# Altium PCB PCB.PcbDoc
Units mm, origin at the board's own origin, x right, y up, seen from the top; angles counter-clockwise.
Board outline 44.96 x 25.27 mm, 4 copper layers (Top Layer, GND Plane, Power Plane, Bottom Layer), stack 1.508 mm thick; 42 components, 39 nets, 209 pads, 132 vias.
Unrouted connection lines stored in the file: 6.
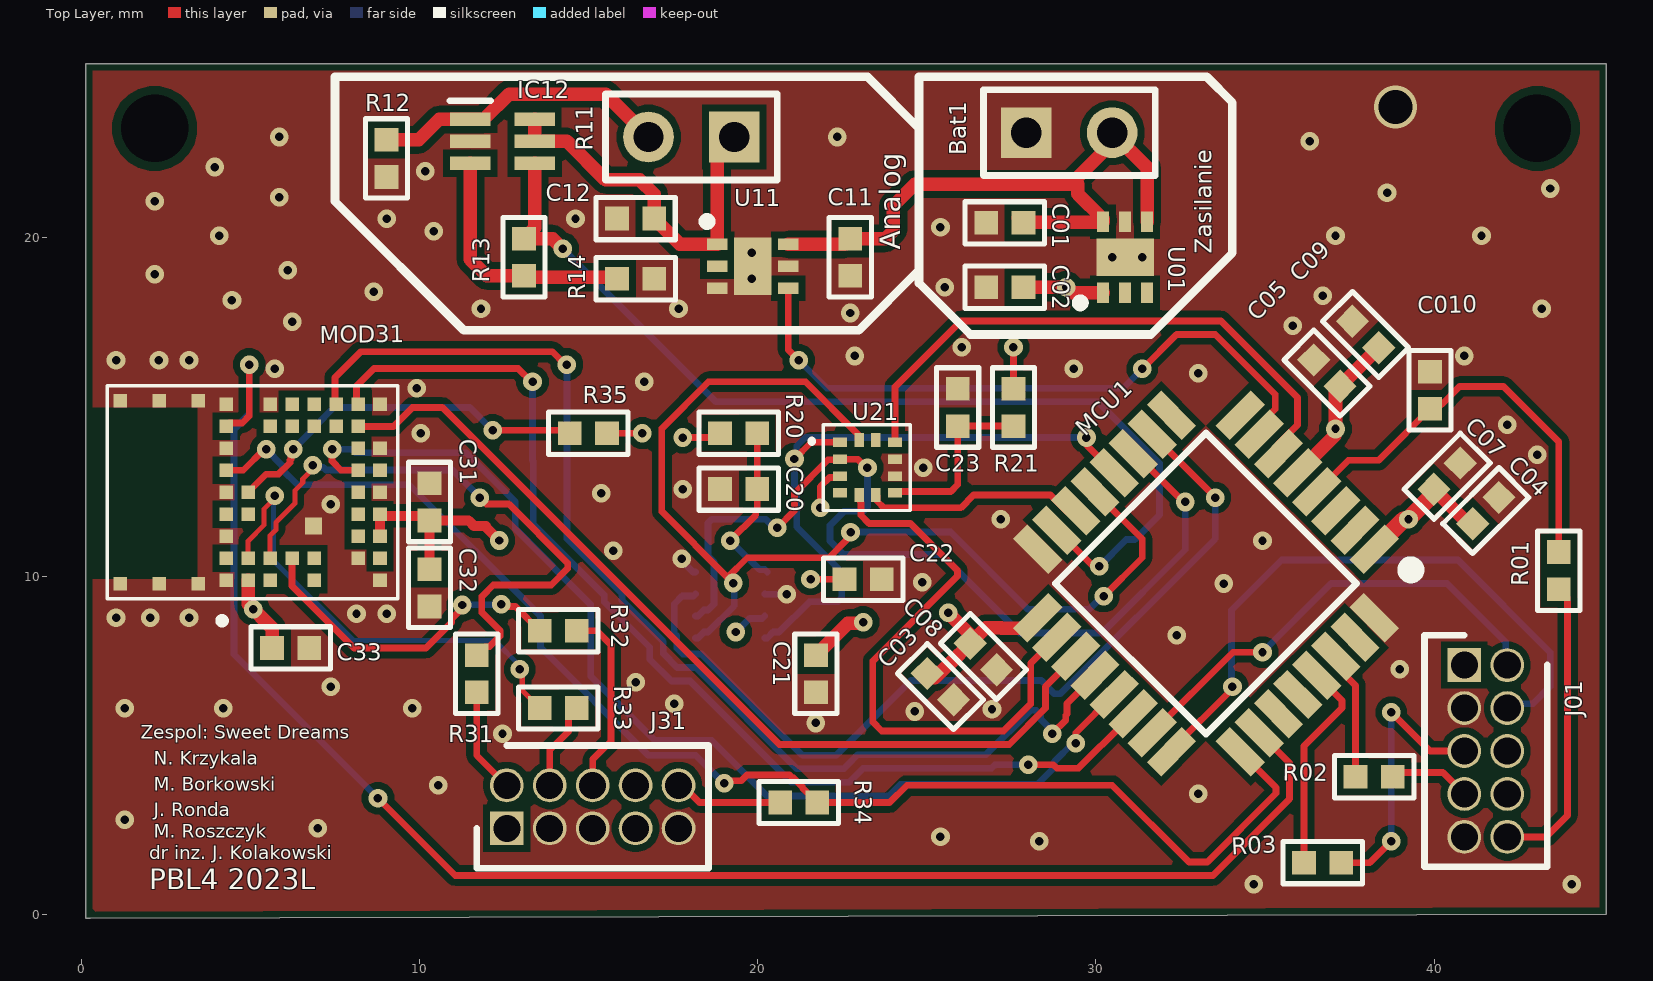
[diagram p0: Top Layer view]
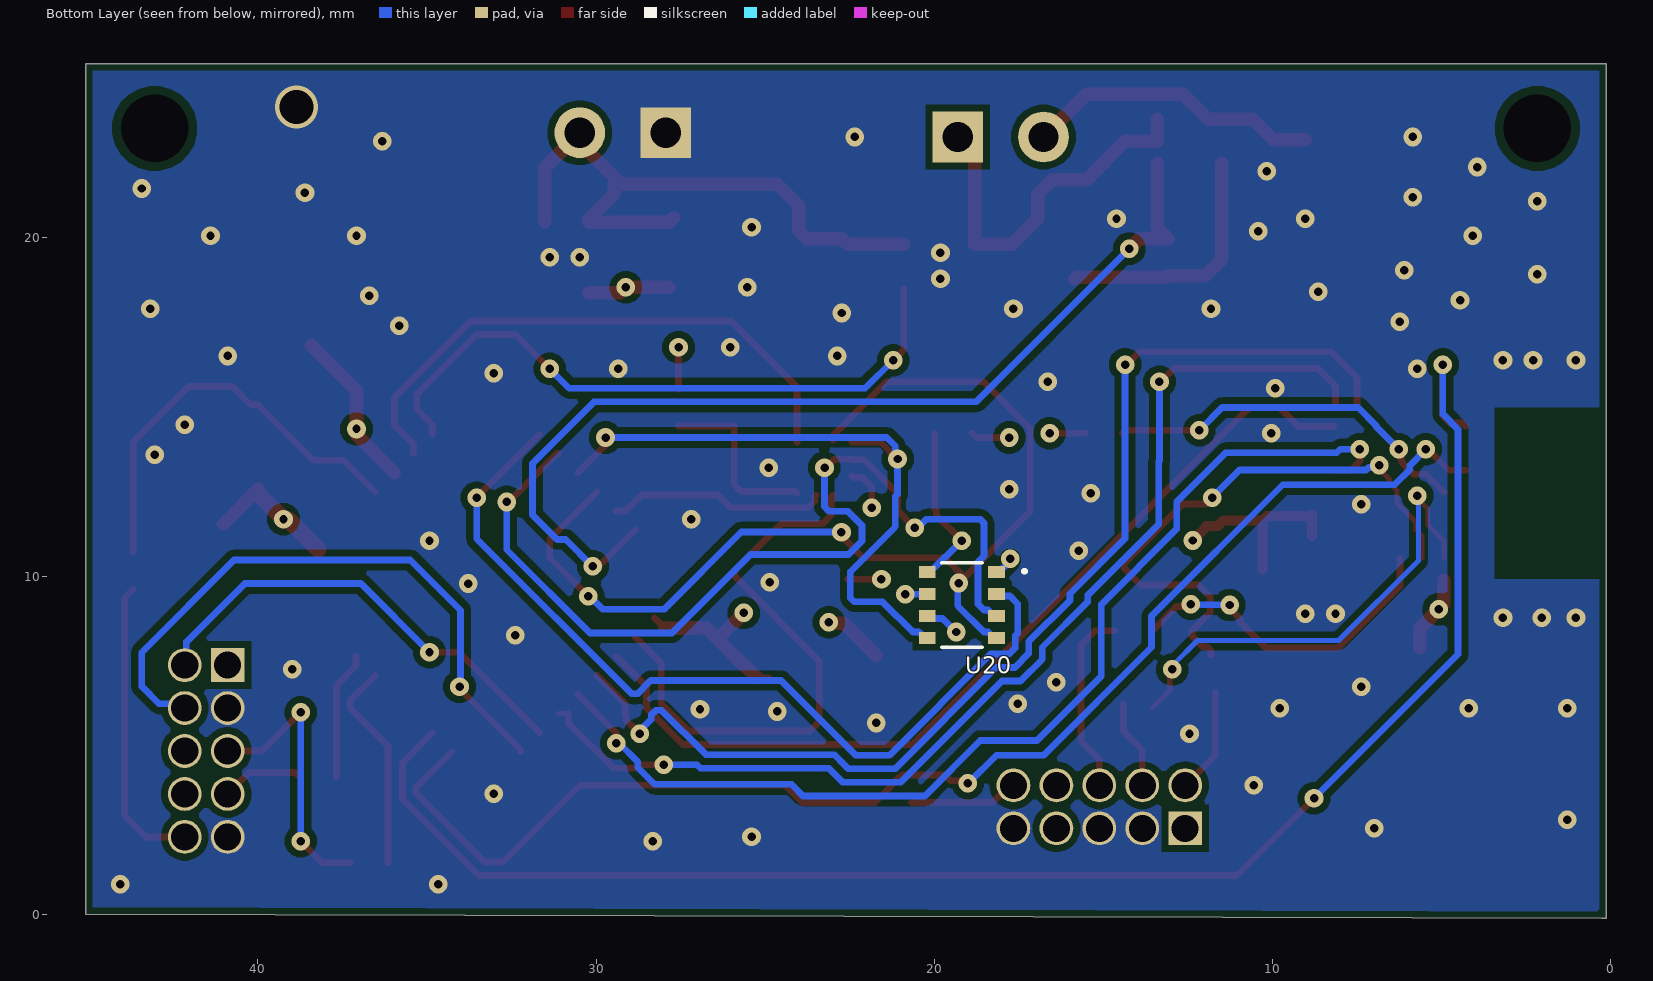
[diagram p1: Bottom Layer view, seen from below]
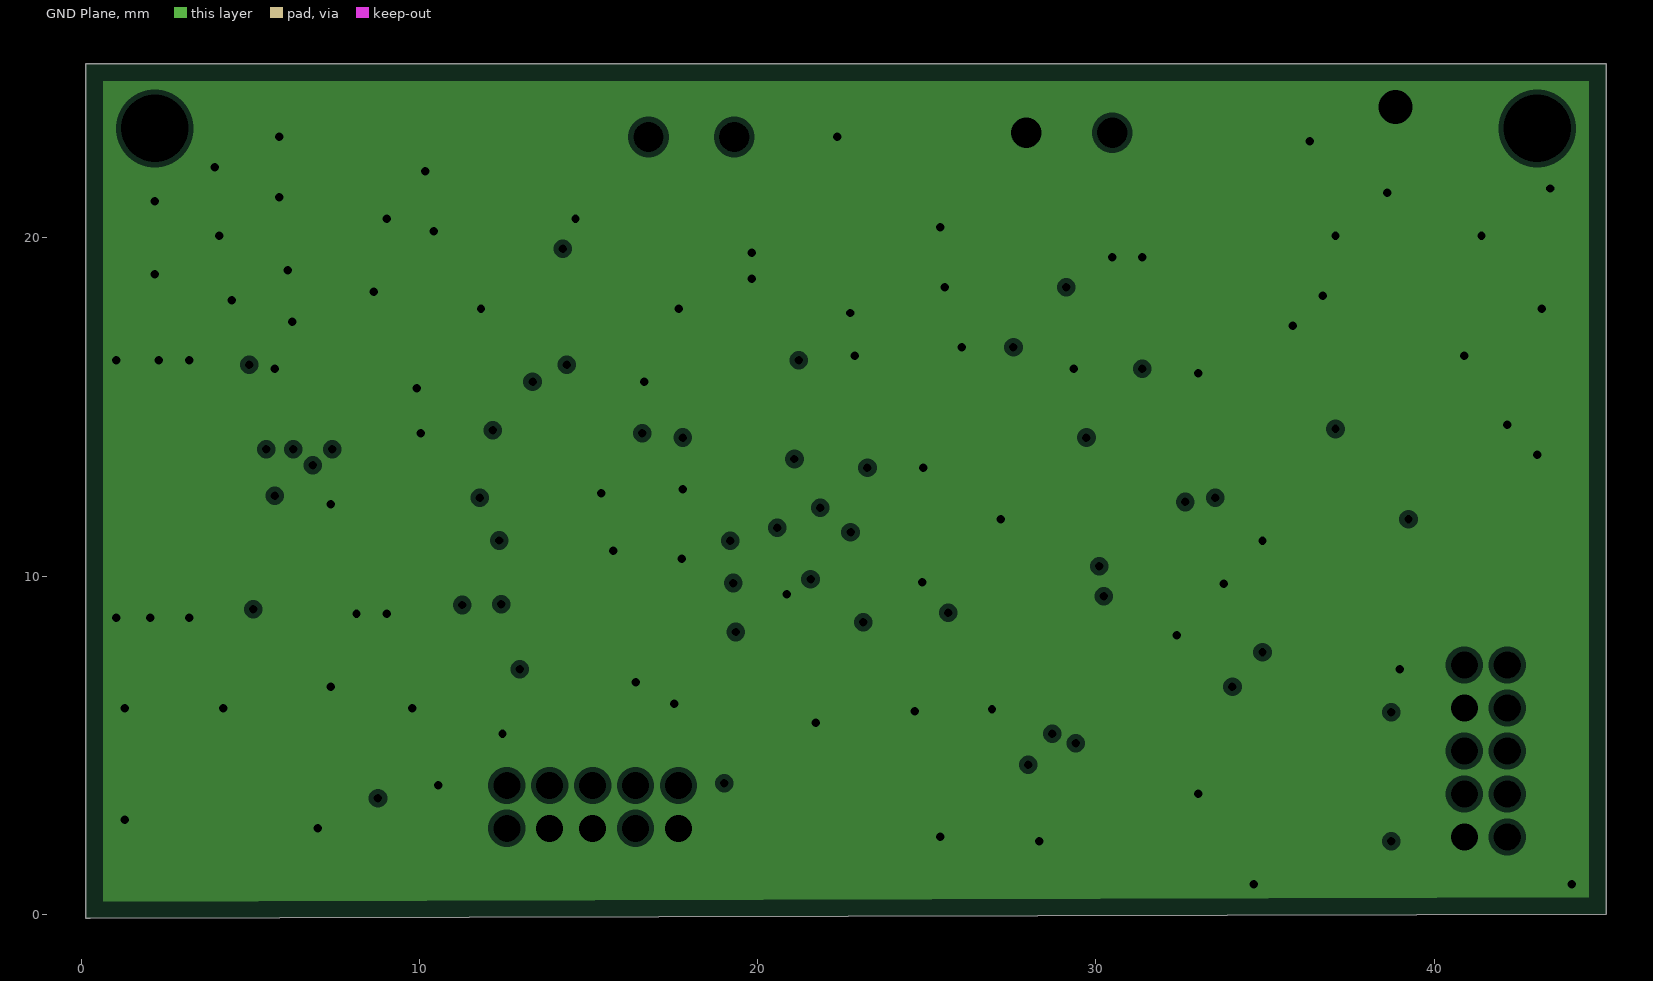
[diagram p2: GND Plane, clearances drawn from the general rule]
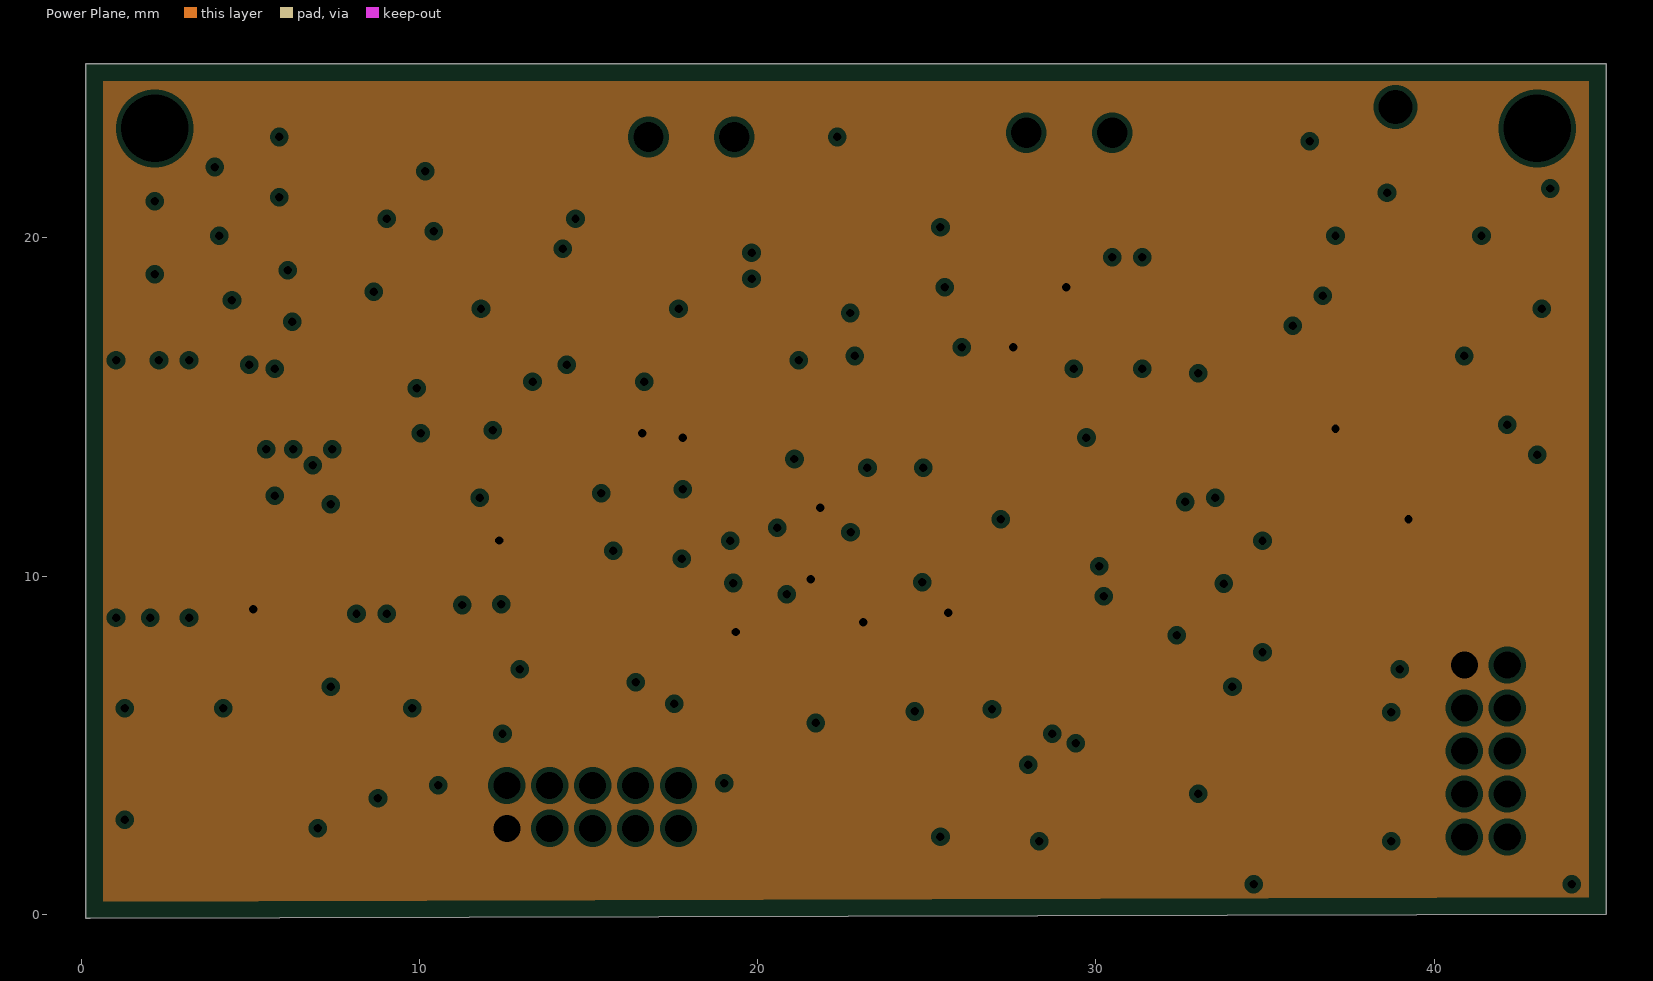
[diagram p3: Power Plane, clearances drawn from the general rule]
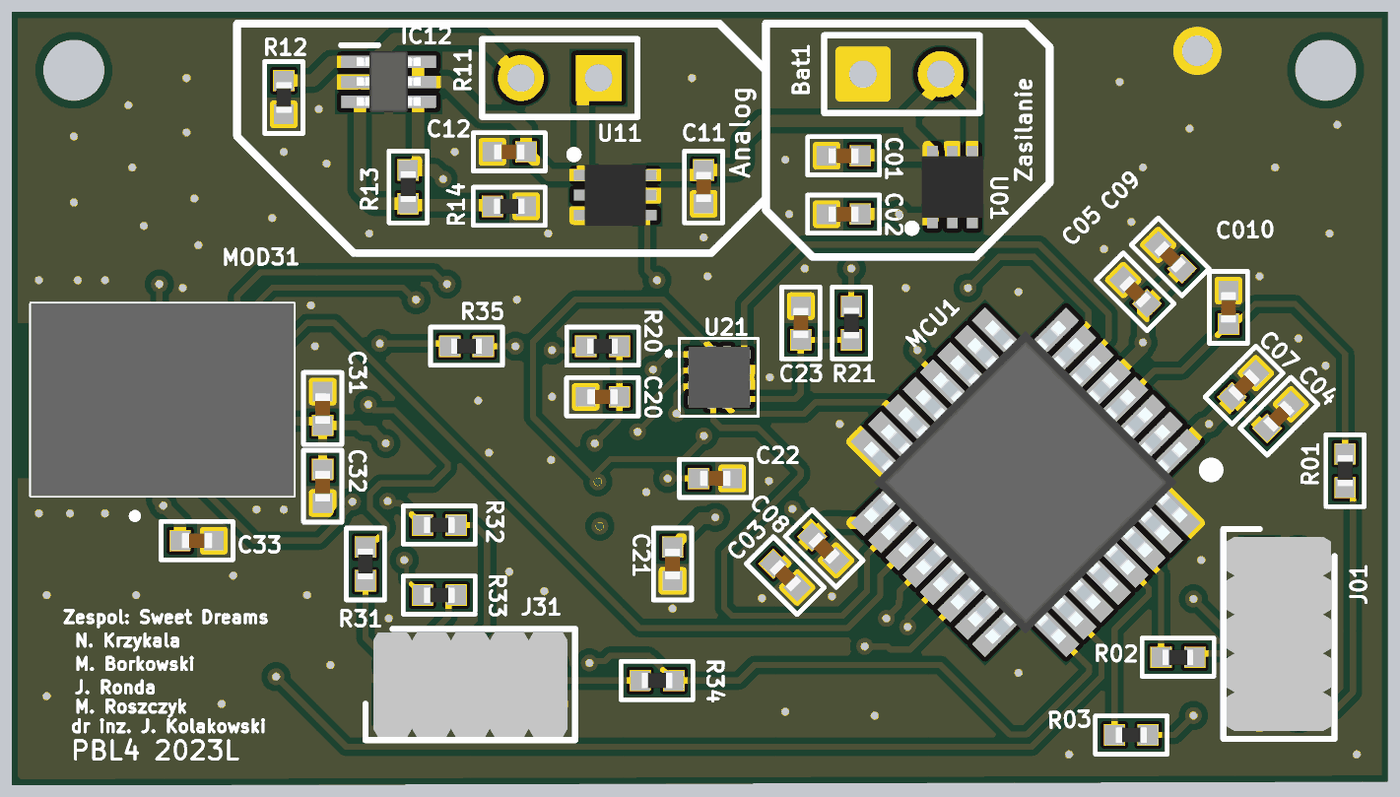
[diagram p4: 3D render of the assembled board from above, using the file's embedded part models]

## Layer stack, top to bottom
Top Solder: solder mask 0.0102, Solder Resist, Dk 3.5
Top Layer: signal copper 0.0356
Prepeg 11: prepreg 0.1727, PP-006, Dk 4.1
Prepreg 12: prepreg 0.1727, PP-006, Dk 4.1
GND Plane: plane copper 0.0178, net GND
CoreDielectric: prepreg 0.71, FR-4, Dk 4.8
Power Plane: plane copper 0.0178, net Vcc
Prepreg 21: prepreg 0.1727, PP-006, Dk 4.1
Prepreg 22: prepreg 0.1727, PP-006, Dk 4.1
Bottom Layer: signal copper 0.0356
Bottom Solder: solder mask 0.0102, Solder Resist, Dk 3.5

## Board outline
45.085,0 45.085,0.254 45.085,25.146 0.127,25.146 0.127,-0.127 0.254,-0.127

## Design rules (kind name [scope] priority, off if disabled: settings)
BoardOutlineClearance [All] p1: gap=0.2 ignorepadtopadclearanceinfootprint=FALSE
Clearance Clearance_safe [All] p1: gap=0.2 ignorepadtopadclearanceinfootprint=FALSE except(0.25: Arc-Hole Track-Hole SMDPad-Hole THPad-Hole Via-Hole Fill-Hole Poly-Hole Region-Hole Text-Hole)
Clearance Clearance_min [All] p2: gap=0.102 ignorepadtopadclearanceinfootprint=FALSE except(0.127: Arc-Via Track-Via SMDPad-Via THPad-Via Via-Via Via-Fill Via-Poly Via-Region Via-Text; 0.25: Arc-Hole Track-Hole SMDPad-Hole THPad-Hole Via-Hole Fill-Hole Poly-Hole Region-Hole Text-Hole)
ComponentClearance [All] p1: gap=0.102 collisioncheckmode=3 verticalgap=0.102 showdistances=TRUE
DiffPairsRouting [All] p1: maxlimit=0.102 minlimit=0.102 mostfreqgap=0.102 toplayer_minwidth=0.102 toplayer_maxwidth=1816.048 toplayer_prefwidth=0.102 bottomlayer_minwidth=0.102 bottomlayer_maxwidth=1816.048 bottomlayer_prefwidth=0.102 maxuncoupledlength=12.7
Height [All] p1: minheight=0 maxheight=1816.048 prefheight=12.7
HoleSize [All] p1: absolutevalues=TRUE maxlimit=6.3 minlimit=0.15 maxpercent=80.000 minpercent=20.000
HoleToHoleClearance [All] p1: gap=0.25 allowstackedmicrovias=FALSE
MinimumAnnularRing [All] p1: minimumring=0.076
MinimumSolderMaskSliver [All] p1: minsoldermaskwidth=0
PlaneClearance [All] p1: clearance=0.15
PlaneConnect PlaneConnectPowerPads [InPadClass('PowerPads')] p1: planeconnectstyle=Direct reliefexpansion=0.5 reliefentries=4 reliefconductorwidth=0.4 reliefairgap=0.2
PlaneConnect [All] p2: planeconnectstyle=Direct reliefexpansion=0.3 reliefentries=4 reliefconductorwidth=0.2 reliefairgap=0.15
PolygonConnect PolygonConnectPowerPads [All vs (InPadClass('PowerPads'))] p1: connectstyle=Direct reliefconductorwidth=0.254 reliefentries=4 polygonreliefangle="90 Angle" airgapwidth=0.254
PolygonConnect [All] p2: connectstyle=Direct reliefconductorwidth=0.102 reliefentries=4 polygonreliefangle="90 Angle" airgapwidth=0.102
RoomDefinition U_BL653u [InComponentClass('U_BL653u')] p1: confinementstyle=ConfineOut formatcopy=TRUE lockcomponents=FALSE outline -64.008,-0.127 -13.208,-0.127 -13.208,25.273 -64.008,25.273
RoomDefinition U_SchematicTensometr [InComponentClass('U_SchematicTensometr')] p2: confinementstyle=ConfineOut formatcopy=TRUE lockcomponents=FALSE outline -64.008,-0.254 -13.208,-0.254 -13.208,25.146 -64.008,25.146
RoomDefinition U_DigitalSensors [InComponentClass('U_DigitalSensors')] p3: confinementstyle=ConfineOut formatcopy=TRUE lockcomponents=FALSE outline -64.008,-0.254 -13.208,-0.254 -13.208,25.146 -64.008,25.146
RoomDefinition U_CPU&POWER [InComponentClass('U_CPU&POWER')] p4: confinementstyle=ConfineOut formatcopy=TRUE lockcomponents=FALSE outline -63.881,-0.254 -13.081,-0.254 -13.081,25.146 -63.881,25.146
RoutingVias [All] p1: holewidth=0.2 width=0.45 viastyle="Through Hole" minholewidth=0.2 minwidth=0.45 maxholewidth=6.3 maxwidth=6.55
SilkToSilkClearance [All] p1: silktosilkclearance=0
SilkToSolderMaskClearance [IsPad] p1: minsilkscreentomaskgap=0.1 clearancetoexposedcopper=TRUE
SolderMaskExpansion SolderMaskExpansion_safe [All] p1: expansion=0.15 istentingtop=FALSE
SolderMaskExpansion SolderMaskExpansion_min [All] p2: expansion=0.075 istentingtop=FALSE
Width Width_safe [All] p1: maxlimit=3 minlimit=0.15 preferedwidth=0.2 minimp=50.000000 maximp=50.000000 favimp=50.000000
Width Width_min [All] p2: maxlimit=1816.048 minlimit=0.102 preferedwidth=0.102
20 further rules are at their usual default settings.

## Classes and differential pairs
component class U_SchematicTensometr: C11 C12 IC11 IC12 R11 R12 R13 R14 U11
component class U_DigitalSensors: C20 C21 C22 C23 R20 R21 U20 U21
component class U_CPU&Power: Bat1 C01 C02 C03 C04 C05 C08 C010 J01 MCU1 R01 R02 R03 U1 U01
component class U_BL653u: C31 C32 C33 J31 MOD31 R31 R32 R33 R34 R35

## Components (designator, comment, footprint, x,y, rotation, side; value= is the part's Value field where it differs from the comment)
Bat1 "Header 2" HDR1X2 27.94,23.114 r0 top
C01 "1uF" 0402_CAP 27.305,20.447 r0 top
C02 "1uF" 0402_CAP 27.305,18.542 r0 top
C03 "100nF" 0402_CAP 25.4,6.731 r315 top
C04 "100nF" 0402_CAP 41.529,11.938 r45 top
C05 "100nF" 0402_CAP 36.83,16.002 r135 top
C07 "1uF" 0402_CAP 40.386,12.954 r45 top
C08 "10uF" 0402_CAP 26.67,7.62 r315 top
C09 "10uF" 0402_CAP 37.973,17.145 r135 top
C010 "100nF" 0402_CAP 39.878,15.494 r270 top
C11 "1uF" 0402_CAP 22.733,19.431 r270 top
C12 "1uF" 0402_CAP 16.383,20.574 r180 top
C20 "100n" 0402_CAP 19.431,12.573 r180 top
C21 "100n" 0402_CAP 21.717,7.112 r270 top
C22 "100n" 0402_CAP 23.114,9.906 r0 top
C23 "100n" 0402_CAP 25.908,14.986 r270 top
C31 "Capacitor_1" 0402_CAP 10.287,12.192 r270 top
C32 "Capacitor_1" 0402_CAP 10.287,9.652 r90 top
C33 "Capacitor_1" 0402_CAP 6.181,7.874 r180 top
IC12 "LMV341IDCKR" SOT65P210X110-6N_m 12.446,22.86 r0 top
J01 "20021111-00010T4LF" HDRV10W41P127_2X5_635X343X575P_m 40.894,7.366 r270 top
J31 "20021111-00010T4LF" HDRV10W41P127_2X5_635X343X575P_m 12.573,2.54 r0 top
MCU1 "STM32L010K4T6" QFP80P900X900X160-32N_m 33.25,9.778 r225 top locked
MOD31 "Laird, BL653u" 45300059C_M 5.053,12.479 r90 top locked
R01 "100R" 0402_RES 43.688,10.16 r90 top
R02 "100R" 0402_RES 38.227,4.064 r0 top
R03 "100R" 0402_RES 36.703,1.524 r180 top
R11 "Tensometr" HDR1X2 19.304,22.987 r180 top
R12 "100k" 0402_RES 9.017,22.352 r90 top
R13 "100k" 0402_RES 13.081,19.431 r270 top
R14 "200k" 0402_RES 16.383,18.796 r180 top
R20 "100R" 0402_RES 19.431,14.224 r0 top
R21 "100R" 0402_RES 27.559,14.986 r270 top
R31 "Resistor" 0402_RES 11.684,7.112 r270 top
R32 "Resistor" 0402_RES 14.097,8.382 r0 top
R33 "Resistor" 0402_RES 14.097,6.096 r180 top
R34 "Resistor" 0402_RES 21.209,3.302 r0 top
R35 "Resistor" 0402_RES 14.986,14.224 r0 top
U01 "LP5912-Q1.5DRVRQ1" SON65P200X200X80-7N_m 30.861,19.431 r90 top
U11 "LP5912-Q1.5DRVRQ1" SON65P200X200X80-7N_m 19.846,19.162 r0 top
U20 "BME280" MODBME280_m 19.177,9.144 r180 bottom
U21 "BMA456" BOSCH_LGA-12 23.241,13.208 r0 top

## Footprints (in the part's own frame and the unit in brackets; to place one, negate y for a bottom-side part, rotate by r counter-clockwise, add the part's x,y. Pads: shape width x height; smd on the part's side, far side on the other; paste and mask are expansions set on the pad)
0402_CAP [mm]
  rect 0.7x0.7 smd paste-0.03 mask+0.1: 1(0.55,0) 2(-0.55,0)
  silkscreen extent -1.18,-0.62 1.18,0.62, body extent -0.5,-0.25 0.5,0.25, height 0.5
0402_RES [mm]
  rect 0.7x0.7 smd paste-0.03 mask+0.1: 1(0.55,0) 2(-0.55,0)
  silkscreen extent -1.18,-0.62 1.18,0.62, body extent -0.5,-0.25 0.5,0.25, height 0.3
45300059C_M [mm]
  rect 0.4x0.4 smd: 1(-2.6,0.78) 2(-1.95,0.78) 3(-1.3,0.78) 4(-0.65,0.78) 5(0,0.78) 6(0.65,0.78) 7(1.3,0.78) 8(1.95,0.78) 9(2.6,0.78) 11(2.6,-0.52) 12(2.6,-1.17) 13(2.6,-1.82) 14(2.6,-2.47) 15(2.6,-3.12) 16(2.6,-3.77) 18(1.3,-3.77) 19(0.65,-3.77) 20(0,-3.77) 21(-0.65,-3.77) 22(-1.3,-3.77) 23(-1.95,-3.77) 24(-2.6,-3.77) 27(-2.6,-1.82) 29(-2.6,-0.52) 30(-2.6,0.13) 31(-1.95,0.13) 33(-0.65,0.13) 34(0,0.13) 38(1.95,-0.52) 39(1.95,-1.17) 40(1.95,-1.82) 41(1.95,-2.47) 42(1.95,-3.12) 43(1.3,-3.12) 44(0.65,-3.12) 45(0,-3.12) 46(-0.65,-3.12) 47(-1.3,-3.12) 48(-1.95,-3.12) 50(-1.95,-1.82) 51(-1.95,-1.17) 52(-1.95,-0.52) G2(2.7,3.91) G3(2.7,2.76) G4(2.7,1.61) G5(-2.7,1.61) G6(-2.7,2.76) G7(-2.7,3.91)
  rect 0.5x0.5 smd: G1(-1,-1.8)
  silkscreen extent -3.9,-4.3 3.15,4.3, body extent -3.15,-4.3 3.15,4.3, height 1.7
BOSCH_LGA-12 [mm]
  rect 0.41x0.28 smd: 1(-0.815,0.75) 2(-0.815,0.25) 3(-0.815,-0.25) 4(-0.815,-0.75) 7(0.815,-0.75) 8(0.815,-0.25) 9(0.815,0.25) 10(0.815,0.75)
  rect 0.28x0.41 smd: 5(-0.25,-0.815) 6(0.25,-0.815) 11(0.25,0.815) 12(-0.25,0.815)
  silkscreen extent -1.65,-1.27 1.27,1.27, body extent -1,-1 1,1, height 1.02
HDR1X2 [mm] "Connector; Header; 2 Position"
  rect 1.5x1.5 hole 0.9: 1(0,0)
  round 1.5 hole 0.9: 2(2.54,0)
  silkscreen extent -1.27,-1.27 3.81,1.27
HDRV10W41P127_2X5_635X343X575P_m [mm]
  rect 1x1 hole 0.8: 1(0,0)
  round 1 hole 0.8: 2(0,1.27) 3(1.27,0) 4(1.27,1.27) 5(2.54,0) 6(2.54,1.27) 7(3.81,0) 8(3.81,1.27) 9(5.08,0) 10(5.08,1.27)
  silkscreen extent -0.88,-1.18 5.96,2.45, body extent -0.64,-1.07 5.71,2.33, height 5.55
MODBME280_m [mm]
  rect 0.5x0.35 smd: 1(1.025,0.975) 2(1.025,0.325) 3(1.025,-0.325) 4(1.025,-0.975) 5(-1.025,-0.975) 6(-1.025,-0.325) 7(-1.025,0.325) 8(-1.025,0.975)
  silkscreen extent -0.6,-1.25 1.9,1.25, body extent -1.25,-1.25 1.25,1.25, height 0.93
QFP80P900X900X160-32N_m [mm]
  rect 1.475x0.6 smd: 1(-4.238,2.8) 2(-4.238,2) 3(-4.238,1.2) 4(-4.238,0.4) 5(-4.238,-0.4) 6(-4.238,-1.2) 7(-4.238,-2) 8(-4.238,-2.8) 17(4.238,-2.8) 18(4.238,-2) 19(4.238,-1.2) 20(4.238,-0.4) 21(4.238,0.4) 22(4.238,1.2) 23(4.238,2) 24(4.238,2.8)
  rect 0.6x1.475 smd: 9(-2.8,-4.238) 10(-2,-4.238) 11(-1.2,-4.238) 12(-0.4,-4.238) 13(0.4,-4.238) 14(1.2,-4.238) 15(2,-4.238) 16(2.8,-4.238) 25(2.8,4.238) 26(2,4.238) 27(1.2,4.238) 28(0.4,4.238) 29(-0.4,4.238) 30(-1.2,4.238) 31(-2,4.238) 32(-2.8,4.238)
  silkscreen extent -4.77,-3.15 3.15,4.2, body extent -4.5,-4.5 4.5,4.5, height 1.6
SON65P200X200X80-7N_m [mm]
  rect 0.6x0.35 smd: 1(-1.05,0.65) 2(-1.05,0) 3(-1.05,-0.65) 4(1.05,-0.65) 5(1.05,0) 6(1.05,0.65)
  rect 1.1x1.7 smd: 7(0,0)
  silkscreen extent -1.47,1.2 -1.23,1.45, body extent -1,-1 1,1, height 0.8
SOT65P210X110-6N_m [mm]
  rect 1.2x0.4 smd: 1(-0.95,0.65) 2(-0.95,0) 3(-0.95,-0.65) 4(0.95,-0.65) 5(0.95,0) 6(0.95,0.65)
  silkscreen extent -1.55,1.2 -0.35,1.2, body extent -1.05,-0.99 1.05,1.01, height 1

## Part data
Bat1: "Header, 2-Pin", LatestRevisionDate=17-Jul-2002, LatestRevisionNote="Re-released for DXP Platform.", Publisher="Altium Limited"
C01 C02 C03 C04 C05 C07 C08 C09 C010 C11 C12 C20 C21 C22 C23: library part Cap, "Ceramic capacitor"
IC12: "Integrated Circuit", Manufacturer_Name="Texas Instruments", Mouser Part Number=595-LMV341IDCKR, Arrow Part Number=LMV341IDCKR, Arrow Price/Stock=https://www.arrow.com/en/products/lmv341idckr/texas-instruments, Datasheet Link=http://www.ti.com/lit/gpn/lmv341, Height=1.1mm, Manufacturer_Part_Number=LMV341IDCKR, Mouser Price/Stock=https://www.mouser.co.uk/ProductDetail/Texas-Instruments/LMV341IDCKR/?qs=paYhMW8qfiso3OfEEvyk%2Fg%3D%3D
J01 J31: "Connector", Manufacturer_Name="Amphenol Communications Solutions", Mouser Part Number=649-221111-00010T4LF, Arrow Part Number=20021111-00010T4LF, Arrow Price/Stock=https://www.arrow.com/en/products/20021111-00010t4lf/amphenol-fci?region=europe, Datasheet Link=https://cdn.amphenol-cs.com/media/wysiwyg/files/drawing/20021111.pdf, Height=5.75mm, Manufacturer_Part_Number=20021111-00010T4LF, Mouser Price/Stock=https://www.mouser.co.uk/ProductDetail/Amphenol-FCI/20021111-00010T4LF?qs=nwYJ12Fl9gR8B5xkaYs9gA%3D%3D
MCU1: library part CPU32p
MOD31: "BL653µ Integrated Antenna module, 453-00059", Manufacturer=Laird, Manufacturer Part Number=453-00059, Operating Temperature=-40C~85C, Datasheet Link=https://connectivity-staging.s3.us-east-2.amazonaws.com/s3fs-public/2018-12/BL654%20Datasheet%20v1_6.pdf, Mounting=SMT, Substitutes Allowed=NO
R01 R02 R03 R13 R20 R21: library part RES, "Resistor"
R11: library part "Header 2", "Header, 2-Pin", LatestRevisionDate=17-Jul-2002, LatestRevisionNote="Re-released for DXP Platform.", Publisher="Altium Limited"
R12 R14: library part Resistor
U01 U11: library part STAB
C31 C32 C33: Parameter 1=100nF
R31 R32 R33 R34 R35: Parameter 1=100R

## Free pads (board coordinates)
  round 0 hole 2 unplated: 1(2.159,23.241) 1(43.053,23.241)

## Via types
v1: diameter 0.55, hole 0.25, Top Layer to Bottom Layer, tented both sides, 131 vias
v2: diameter 1.27, hole 1, Top Layer to Bottom Layer, 1 vias

## Nets (pads, with @x,y where several pads share a name; then routed paths per layer and width w, separated by ;. In a path a pad name is that pad's centre, name@x,y a point inside that pad or via, vN(x,y) a via of type N, cw(c..) or ccw(c..) an arc to the next point about the centre after c; other vN are vias at no path point)
AVCC: C12.2 IC12.5 IC12.6 R11.1 U11.1 | length 11.1
  Top Layer w0.4: IC12.6 IC12.5 14.351,22.86 15.494,21.717 16.51,21.717 16.933,21.294 C12.2 17.695,19.812 U11.1 18.796,22.479 R11.1
GND: Bat1.1 C01.2 C02.2 C03.1 C04.1 C05.1 C07.1 C08.1 C09.1 C010.2 C11.1 C12.1 C20.1 C21.1 C22.1 C23.2 C31.2 C32.2 C33.2 IC12.2 J01.3 J01.9 J31.3 J31.5 J31.9 MCU1.16 MCU1.32 MOD31.1 MOD31.3 MOD31.5 MOD31.7 MOD31.9 MOD31.11 MOD31.16 MOD31.18 MOD31.20 MOD31.24 MOD31.48 MOD31.G1 MOD31.G2 MOD31.G3 MOD31.G4 MOD31.G5 MOD31.G6 MOD31.G7 R12.2 R14.2 U01.5 U01.7 U11.3 U11.5 U11.7 U20.1 U20.7 U21.8 U21.9 | length 1.3
  Bottom Layer w0.2: v1(17.748,10.509) 17.748,10.448 18.077,10.119 U20.1 ; U20.7 20.206,9.465 20.855,9.465 v1(20.859,9.461)
  other v1: 34.671,0.889 44.069,0.889 28.321,2.159 25.4,2.286 6.985,2.54 1.27,2.794 33.02,3.556 10.541,3.81 12.446,5.334 21.717,5.655 24.638,5.995 26.924,6.055 1.27,6.096 4.191,6.096 9.779,6.096 17.526,6.223 7.366,6.731 16.383,6.858 38.989,7.239 32.385,8.255 1.016,8.763 2.032,8.763 3.175,8.763 8.128,8.89 9.017,8.89 33.782,9.779 24.865,9.822 15.721,10.746 34.925,11.049 27.178,11.684 7.366,12.125 15.367,12.446 17.78,12.573 24.892,13.208 43.053,13.589 10.033,14.224 42.164,14.478 9.906,15.561 16.637,15.748 33.02,16.002 5.715,16.129 29.337,16.129 1.016,16.383 2.286,16.383 3.175,16.383 22.86,16.51 40.894,16.51 26.035,16.764 35.814,17.399 6.223,17.526 22.733,17.78 11.811,17.907 17.653,17.907 43.18,17.907 4.445,18.161 36.703,18.288 8.636,18.415 25.527,18.542 19.812,18.796 2.159,18.923 6.096,19.05 30.48,19.431 31.369,19.431 19.812,19.558 4.064,20.066 37.084,20.066 41.402,20.066 10.414,20.193 25.4,20.32 9.017,20.574 14.605,20.574 2.159,21.082 5.842,21.209 38.608,21.336 43.434,21.463 10.16,21.971 3.937,22.098 36.322,22.86 5.842,22.987 22.352,22.987
  other v2: 38.862,23.876
LPUART1_RX: MCU1.30 R02.2 | length 3.8
  Top Layer w0.2: MCU1.30 37.096,7.347 37.677,6.766 R02.2
LPUART1_TX: MCU1.29 R03.1 | length 6.3
  Top Layer w0.2: R03.1 36.153,4.972 37.277,6.096 37.277,6.317 MCU1.29
NetC20_2: C20.2 R20.1 U20.8 | length 5
  Top Layer w0.2: v1(19.177,11.049) 19.939,11.811 19.939,11.938 19.981,11.98 R20.1
  Bottom Layer w0.2: v1(19.177,11.049) 19.662,10.564 19.682,10.564 20.052,10.194 20.202,10.194 U20.8@20.277,10.119
NetC23_1: C23.1 R21.1 U21.7 | length 5.3
  Top Layer w0.2: U21.7 24.096,12.498 25.706,12.498 25.908,12.7 C23.1 R21.1
NetIC12_1: IC12.1 R11.2 R12.1 | length 8.8
  Top Layer w0.4: R12.1 9.967,22.902 10.575,23.51 IC12.1 11.896,23.51 12.643,24.257 15.494,24.257 R11.2
NetIC12_3: IC12.3 R13.1 R14.1 | length 7.4
  Top Layer w0.4: IC12.3 11.496,19.365 11.98,18.881 R13.1 13.123,18.838 15.79,18.838 R14.1
NetIC12_4: IC12.4 MCU1.15 R13.2 | length 29.5
  Top Layer w0.2: MCU1.15 29.846,10.354 30.032,10.354 v1(30.099,10.287)
  Top Layer w0.4: IC12.4 13.396,20.296 R13.2 13.928,19.981 v1(14.224,19.685)
  Bottom Layer w0.2: v1(14.224,19.685) 18.755,15.154 30.058,15.154 31.877,13.335 31.877,11.811 31.148,11.082 30.894,11.082 v1(30.099,10.287)
NetJ01_2: J01.2 MCU1.23 | length 13.7
  Top Layer w0.2: MCU1.23 34.048,7.747 v1(34.925,7.747)
  Bottom Layer w0.2: v1(34.925,7.747) 36.957,9.779 40.386,9.779 42.116,8.049 42.116,7.414 J01.2
NetJ01_4: J01.4 MCU1.24 | length 18.7
  Top Layer w0.2: MCU1.24 32.234,4.865 34.036,6.667 v1(34.036,6.731)
  Bottom Layer w0.2: v1(34.036,6.731) 34.009,6.758 34.009,8.99 35.493,10.474 40.707,10.474 43.434,7.747 43.434,6.731 42.926,6.223 42.291,6.223 J01.4
NetJ01_5: J01.5 R03.2 | length 8.2
  Top Layer w0.2: R03.2 38.1,1.524 v1(38.735,2.159) ; v1(38.735,5.969) 39.878,4.826 J01.5
  Bottom Layer w0.2: v1(38.735,2.159) v1(38.735,5.969)
NetJ01_7: J01.7 R02.1 | length 2.4
  Top Layer w0.2: R02.1 38.904,4.191 40.259,4.191 J01.7
NetJ01_10: J01.10 R01.2 | length 8.8
  Top Layer w0.2: J01.10 43.307,2.286 43.942,2.921 43.942,9.243 43.938,9.247 43.938,9.36 R01.2
NetJ31_2: J31.2 R31.1 | length 3.1
  Top Layer w0.2: R31.1 11.684,4.699 J31.2
NetJ31_4: J31.4 R33.2 | length 2.6
  Top Layer w0.2: J31.4 13.843,4.85 14.397,5.404 R33.2@14.397,6.227
NetJ31_6: J31.6 R32.1 | length 5.6
  Top Layer w0.2: R32.1 15.24,8.382 15.655,7.967 15.655,5.114 15.113,4.572 J31.6
NetJ31_10: J31.10 R34.2 | length 3.2
  Top Layer w0.2: J31.10 17.766,3.81 18.274,3.302 R34.2
NetMCU1_7: MCU1.7 U11.4 | length 19.5
  Top Layer w0.2: U11.4 20.896,16.696 v1(21.209,16.383) ; v1(31.369,16.129) 32.385,17.145 33.528,17.145 35.301,15.372 35.301,14.94 34.833,14.472 MCU1.7
  Bottom Layer w0.2: v1(21.209,16.383) 22.038,15.554 30.794,15.554 v1(31.369,16.129)
NetMCU1_14: MCU1.14 U21.6 | length 6.5
  Top Layer w0.2: U21.6 23.531,12.353 23.531,12.214 23.727,12.018 26.002,12.018 26.379,12.394 28.654,12.394 29.122,11.926 MCU1.14
NetMCU1_18: MCU1.18 U21.5 | length 17.1
  Top Layer w0.2: U21.5 23.031,12.353 23.031,12.191 23.051,12.171 23.051,11.798 23.292,11.557 24.511,11.557 25.906,10.162 25.906,9.996 23.4,7.49 23.4,5.683 23.663,5.42 27.268,5.42 28.067,6.219 28.067,7.419 28.839,8.192 MCU1.18
NetMCU1_19: MCU1.19 MOD31.42 | length 27
  Top Layer w0.2: 9.222,14.429 9.779,14.986 10.668,14.986 20.634,5.02 27.434,5.02 28.508,6.094 28.508,6.733 MCU1.19
  Top Layer w0.203: MOD31.42 9.222,14.429
NetMCU1_20: MCU1.20 MOD31.14 | length 34.1
  Top Layer w0.2: MOD31.14@7.493,15.113 7.493,15.875 8.255,16.637 13.919,16.637 14.3,16.256 v1(14.351,16.256) ; v1(28.702,5.334) 28.702,5.338 29.107,5.742 29.107,5.884 29.14,5.917 29.14,6.233 MCU1.20
  Bottom Layer w0.2: v1(14.351,16.256) 14.351,11.107 15.982,9.476 15.982,9.28 17.202,8.059 17.202,7.704 17.612,7.294 17.967,7.294 18.164,7.294 21.159,4.299 22.535,4.299 22.662,4.426 22.954,4.718 26.75,4.718 28.062,6.03 28.228,6.03 28.369,5.888 28.369,5.761 28.702,5.429 v1(28.702,5.334)
NetMCU1_21: MCU1.21 MOD31.44 | length 31.8
  Top Layer w0.2: v1(7.415,13.754) 7.403,13.742 7.403,13.399 7.673,13.129 MOD31.44 ; v1(29.398,5.055) 29.404,5.061 29.404,5.366 MCU1.21
  Bottom Layer w0.2: v1(7.415,13.754) 7.42,13.749 7.99,13.749 8.09,13.649 11.37,13.649 12.827,12.192 12.827,11.386 15.054,9.16 15.054,7.044 16.958,5.14 18.635,5.14 20.276,3.499 23.878,3.499 24.222,3.843 28.264,3.843 28.767,4.346 28.767,4.51 29.312,5.055 v1(29.398,5.055)
NetMCU1_22: MCU1.22 MOD31.15 | length 32.6
  Top Layer w0.15: MCU1.22@30.823,5.933 MCU1.22
  Top Layer w0.2: MOD31.15@8.128,15.113 8.128,15.621 8.643,16.136 12.91,16.136 13.298,15.748 v1(13.335,15.748) ; v1(27.996,4.418) 28.739,4.418 28.839,4.318 29.487,4.318 30.823,5.654 MCU1.22@30.823,5.933
  Bottom Layer w0.2: v1(13.335,15.748) 13.335,13.415 13.354,13.396 13.354,11.538 15.454,9.438 15.454,9.242 16.802,7.894 16.802,7.538 17.446,6.894 17.998,6.894 20.993,3.899 22.701,3.899 22.828,4.026 23.12,4.318 26.916,4.318 27.016,4.418 v1(27.996,4.418)
NetMCU1_25: MCU1.25 MOD31.6 R34.1 | length 40.1
  Top Layer w0.2: MOD31.6 4.779,13.129 5.404,13.754 v1(5.461,13.754) ; v1(19.001,3.877) 19.068,3.944 19.504,3.944 19.676,4.116 20.935,4.116 21.02,4.032 21.054,4.032 21.309,3.776 21.309,3.752 R34.1 23.895,3.302 24.403,3.81 30.48,3.81 32.747,1.543 33.293,1.543 35.327,3.577 35.327,3.742 MCU1.25
  Bottom Layer w0.2: v1(5.461,13.754) 5.461,13.741 5.931,13.271 5.931,13.152 6.382,12.7 9.688,12.7 13.569,8.819 13.569,7.894 16.764,4.699 18.162,4.699 18.984,3.877 v1(19.001,3.877)
NetMCU1_26: MCU1.26 MOD31.8 | length 48.3
  Top Layer w0.2: MOD31.8 4.373,14.529 4.75,14.529 4.953,14.732 v1(4.953,16.256) ; v1(8.763,3.429) 11.049,1.143 33.459,1.143 35.727,3.411 35.727,4.474 MCU1.26
  Bottom Layer w0.2: v1(4.953,16.256) 4.953,14.787 4.505,14.339 4.505,7.687 v1(8.763,3.429)
NetMOD31_31: MOD31.31 R33.1 | length 14.2
  Top Layer w0.15: MOD31.31 4.923,11.04 5.398,11.515 5.398,11.989 5.715,12.306 v1(5.715,12.379) ; v1(12.954,7.239) 13.031,7.162 13.031,6.612 R33.1
  Bottom Layer w0.15: v1(5.715,12.379) 5.675,12.34 5.675,10.454 8.036,8.093 12.208,8.093 12.954,7.347 v1(12.954,7.239)
NetMOD31_34: MOD31.34 R35.2 | length 11.1
  Top Layer w0.2: MOD31.34 5.458,13.014 5.826,13.014 6.163,13.351 6.163,13.426 6.194,13.457 6.194,13.687 v1(6.261,13.754) ; v1(12.154,14.313) 14.347,14.313 R35.2
  Bottom Layer w0.2: v1(6.261,13.754) 6.927,14.42 6.927,14.458 7.455,14.986 11.481,14.986 v1(12.154,14.313)
NetMOD31_51: MOD31.51 R32.2 | length 9.9
  Top Layer w0.2: MOD31.51 6.223,9.705 8.054,7.874 10.183,7.874 10.937,8.628 10.937,8.725 11.261,9.049 v1(11.261,9.144) ; v1(12.411,9.164) 12.478,9.097 12.832,9.097 R32.2
  Bottom Layer w0.2: v1(11.261,9.144) 11.271,9.154 12.401,9.154 v1(12.411,9.164)
NetMOD31_52: MOD31.52 R31.2 | length 17.3
  Top Layer w0.15: MOD31.52 5.573,11.195 5.748,11.37 5.748,11.59 6.303,12.145 6.303,12.526 6.539,12.761 6.539,12.868 6.838,13.167 v1(6.838,13.275)
  Top Layer w0.2: v1(11.779,12.319) 11.966,12.132 12.633,12.132 14.374,10.391 14.374,10.225 13.888,9.739 12.173,9.739 11.836,9.402 11.836,8.925 12.372,8.389 12.372,8.223 12.061,7.912 11.934,7.912 11.811,7.789 R31.2@11.811,7.662
  Bottom Layer w0.2: v1(6.838,13.275) 6.905,13.208 7.148,13.208 7.222,13.134 10.964,13.134 v1(11.779,12.319)
RESET: C010.1 MCU1.4 R01.1 | length 12.4
  Top Layer w0.2: MCU1.4 37.462,13.424 38.358,13.424 40.001,15.067 40.213,15.067 40.751,15.605 42.053,15.605 43.688,13.97 R01.1
SPI1_MISO: MCU1.12 U20.5 U21.1 | length 19.5
  Top Layer w0.2: v1(21.082,13.462) 21.578,13.958 U21.1 ; v1(29.718,14.097) 29.747,14.068 29.747,13.848 MCU1.12
  Bottom Layer w0.2: U20.5 20.277,8.169 20.452,8.344 20.626,8.344 21.52,9.238 22.362,9.238 22.479,9.355 22.479,10.127 21.149,11.457 21.149,12.362 21.082,12.429 v1(21.082,13.462) 21.149,13.529 21.149,13.844 21.402,14.097 v1(29.718,14.097)
SPI1_MOSI: MCU1.11 U20.3 U21.2 | length 28.4
  Top Layer w0.2: v1(20.574,11.43) 21.081,11.937 21.081,12.448 22.072,13.439 22.407,13.439 U21.2 22.95,13.458 23.2,13.208 v1(23.241,13.208) ; MCU1.11 31.155,13.623 32.586,12.192 v1(32.639,12.192)
  Bottom Layer w0.2: U20.3 18.227,8.819 18.402,8.994 18.526,8.994 18.702,9.17 18.702,9.768 18.701,9.819 18.702,10.418 18.526,10.594 18.526,11.567 18.643,11.684 20.225,11.684 20.479,11.43 v1(20.574,11.43) ; v1(23.241,13.208) 23.241,12.051 23.105,11.914 22.546,11.914 22.131,11.5 22.131,11.041 22.533,10.639 25.429,10.639 27.748,8.32 30.18,8.32 32.639,10.779 v1(32.639,12.192)
SPI1_NSS_1: MCU1.10 U20.2 | length 26.2
  Top Layer w0.2: MCU1.10 v1@33.533,12.324
  Bottom Layer w0.2: U20.2 18.094,9.411 17.76,9.411 17.526,9.177 17.526,8.301 17.602,8.225 17.602,7.87 17.778,7.694 18.133,7.694 18.329,7.694 21.324,4.699 22.316,4.699 24.525,6.908 28.384,6.908 28.776,6.516 28.941,6.516 33.528,11.102 v1(33.528,12.319)
SPI1_NSS_2: MCU1.6 U21.10 | length 17.2
  Top Layer w0.2: U21.10 24.056,15.598 26.003,17.545 33.694,17.545 35.961,15.278 35.961,14.469 35.399,13.906 MCU1.6
SPI1_SCK: MCU1.13 U20.4 U21.12 | length 31.9
  Top Layer w0.2: v1(19.276,9.794) v1@19.107,9.963 ; v1(22.74,11.296) 22.74,11.201 22.606,11.067 22.606,11.049 22.098,10.541 19.685,10.541 v1@19.107,9.963 ; U21.12 22.951,14.063 22.951,14.202 21.405,15.748 18.542,15.748 17.16,14.366 17.16,11.91 v1@19.107,9.963 ; MCU1.13 31.369,11.094 31.369,10.541 v1(30.226,9.398)
  Bottom Layer w0.2: U20.4 18.227,8.169 18.402,8.344 18.526,8.344 19.301,9.119 19.301,9.769 v1(19.276,9.794) ; v1(22.74,11.296) 22.747,11.303 25.705,11.303 27.991,9.017 29.794,9.017 30.175,9.398 v1(30.226,9.398)
Vbat: Bat1.2 C01.1 C11.2 U01.4 U01.6 U11.6 | length 18.8
  Top Layer w0.4: U11.6 22.564,19.812 C11.2 23.769,19.981 24.003,20.215 24.003,20.955 24.638,21.59 29.254,21.59 ; C01.1@27.705,20.597 C01.1 27.872,20.464 30.194,20.464 U01.6 30.211,20.556 29.464,21.303 29.464,21.59 29.254,21.59 ; U01.4 31.511,22.083 Bat1.2 30.48,22.816 29.254,21.59
Vcc: C02.1 C03.2 C04.2 C05.2 C07.2 C08.2 C09.2 C21.2 C22.2 C31.1 C32.1 C33.1 J01.1 J31.1 MCU1.1 MCU1.5 MCU1.17 MOD31.21 MOD31.22 MOD31.30 R20.2 R21.2 R35.1 U01.1 U20.6 U21.3 | length 33.5
  Top Layer w0.2: MOD31.22 MOD31.22@8.834,11.168 ; R35.1 v1(16.585,14.224) ; v1(17.78,14.097) 18.754,14.097 R20.2 ; v1(21.557,9.906) C22.2 ; v1(21.844,12.026) 21.844,12.645 22.117,12.918 22.386,12.918 U21.3 ; C03.2@24.884,6.993 C03.2@25.238,6.993 ; 25.657,7.413 25.685,7.413 ; C08.2 C08.2@26.281,8.263 ; 27.203,8.469 27.219,8.452 ; R21.2 v1(27.559,16.764) ; MCU1.17@27.964,8.452 27.995,8.483 MCU1.17 ; v1(29.115,18.542) v1@29.151,18.506 ; C07.2@39.997,12.438 C07.2 ; C04.2@41.013,11.549 C04.2
  Top Layer w0.3: MOD31.22 MOD31.21 8.873,11.779 10.15,11.779 C31.1 ; C32.1 C31.1 ; v1(12.349,11.052) 11.95,11.451 11.95,11.478 11.608,11.478 11.444,11.642 C31.1
  Top Layer w0.4: MOD31.30 4.923,9.174 5.631,8.466 C33.1 ; C21.2 22.663,8.607 v1@23.085,8.607 ; C03.2@25.238,6.993 25.657,7.413 ; v1(25.633,8.91) C08.2@26.281,8.263 ; 25.685,7.413 C08.2 26.741,8.469 27.203,8.469 ; 27.219,8.452 MCU1.17@27.964,8.452 ; C02.1 v1(29.115,18.542) ; v1@29.151,18.506 29.276,18.381 U01.1 ; MCU1.5 37.055,14.149 37.055,14.322 v1(37.084,14.351) 37.084,15.478 C09.2@38.425,16.82 ; v1@39.087,11.655 39.214,11.655 v1(39.243,11.684) ; C07.2 C04.2@41.013,11.549
  Top Layer w0.5: MCU1.1 v1@39.087,11.655 ; v1(39.243,11.684) C07.2@39.997,12.438
  Bottom Layer w0.2: v1(19.341,8.345) 19.356,8.345 19.755,8.744 20.127,8.744 U20.6 ; v1@23.085,8.607 v1(23.114,8.636)
  other v1: 5.08,9.017
pads on no net: J01.6 J01.8 J31.7 J31.8 MCU1.2 MCU1.3 MCU1.8 MCU1.9 MCU1.27 MCU1.28 MCU1.31 MOD31.2 MOD31.4 MOD31.12 MOD31.13 MOD31.19 MOD31.23 MOD31.27 MOD31.29 MOD31.33 MOD31.38 MOD31.39 MOD31.40 MOD31.41 MOD31.43 MOD31.45 MOD31.46 MOD31.47 MOD31.50 U01.2 U01.3 U11.2 U21.4 U21.11

## Polygon pours and split planes (outlines as drawn)
GND on Bottom Layer "GND_L04_P002" (solid, pour order 2): 0,0 0,25.146 44.958,25.146 44.958,0
GND on Top Layer "GND_L01_P001" (solid, pour order 1): 0,0 0,25.146 44.958,25.146 44.958,0
Vcc on Power Plane (split plane): 44.575,0.509 0.637,0.385 0.637,24.636 44.575,24.636
GND on GND Plane (split plane): 44.575,0.509 0.637,0.385 0.637,24.636 44.575,24.636

## Other copper
Top Layer:
  pour cut-out: 0.254,14.986 3.429,14.986 3.429,9.906 0.254,9.906
Bottom Layer:
  pour cut-out: 0.254,14.986 3.429,14.986 3.429,9.906 0.254,9.906

## Silkscreen, mask and mechanical layers (free items; w line width, h text height)
Top Overlay:
  lines w0.254: 7.493,21.082 7.493,24.765 23.241,24.765 24.765,23.241 24.765,19.05 22.987,17.272 11.303,17.272 7.493,21.082 ; 24.765,18.669 26.289,17.145 31.623,17.145 34.036,19.558 34.036,24.003 33.274,24.765 24.765,24.765 24.765,18.669
  text "Analog" at 24.211,19.658 h0.6 r90
  text "Zasilanie" at 33.428,19.531 h0.5 r90
  text "Zespol: Sweet Dreams" at 1.751,5.186 h0.4
  text "N. Krzykala" at 2.132,4.424 h0.4
  text "M. Borkowski" at 2.132,3.656 h0.4
  text "J. Ronda" at 2.132,2.894 h0.4
  text "M. Roszczyk" at 2.132,2.265 h0.4
  text "dr inz. J. Kolakowski" at 2.005,1.624 h0.4
  text "PBL4 2023L" at 2.005,0.735 h0.6
Mechanical 1:
  lines w0.254: 0,0 0,25.146 44.958,25.146 44.958,0 0,0